# EAGLE board PCB-JOY-4AXIS (EAGLE 7.7.0)
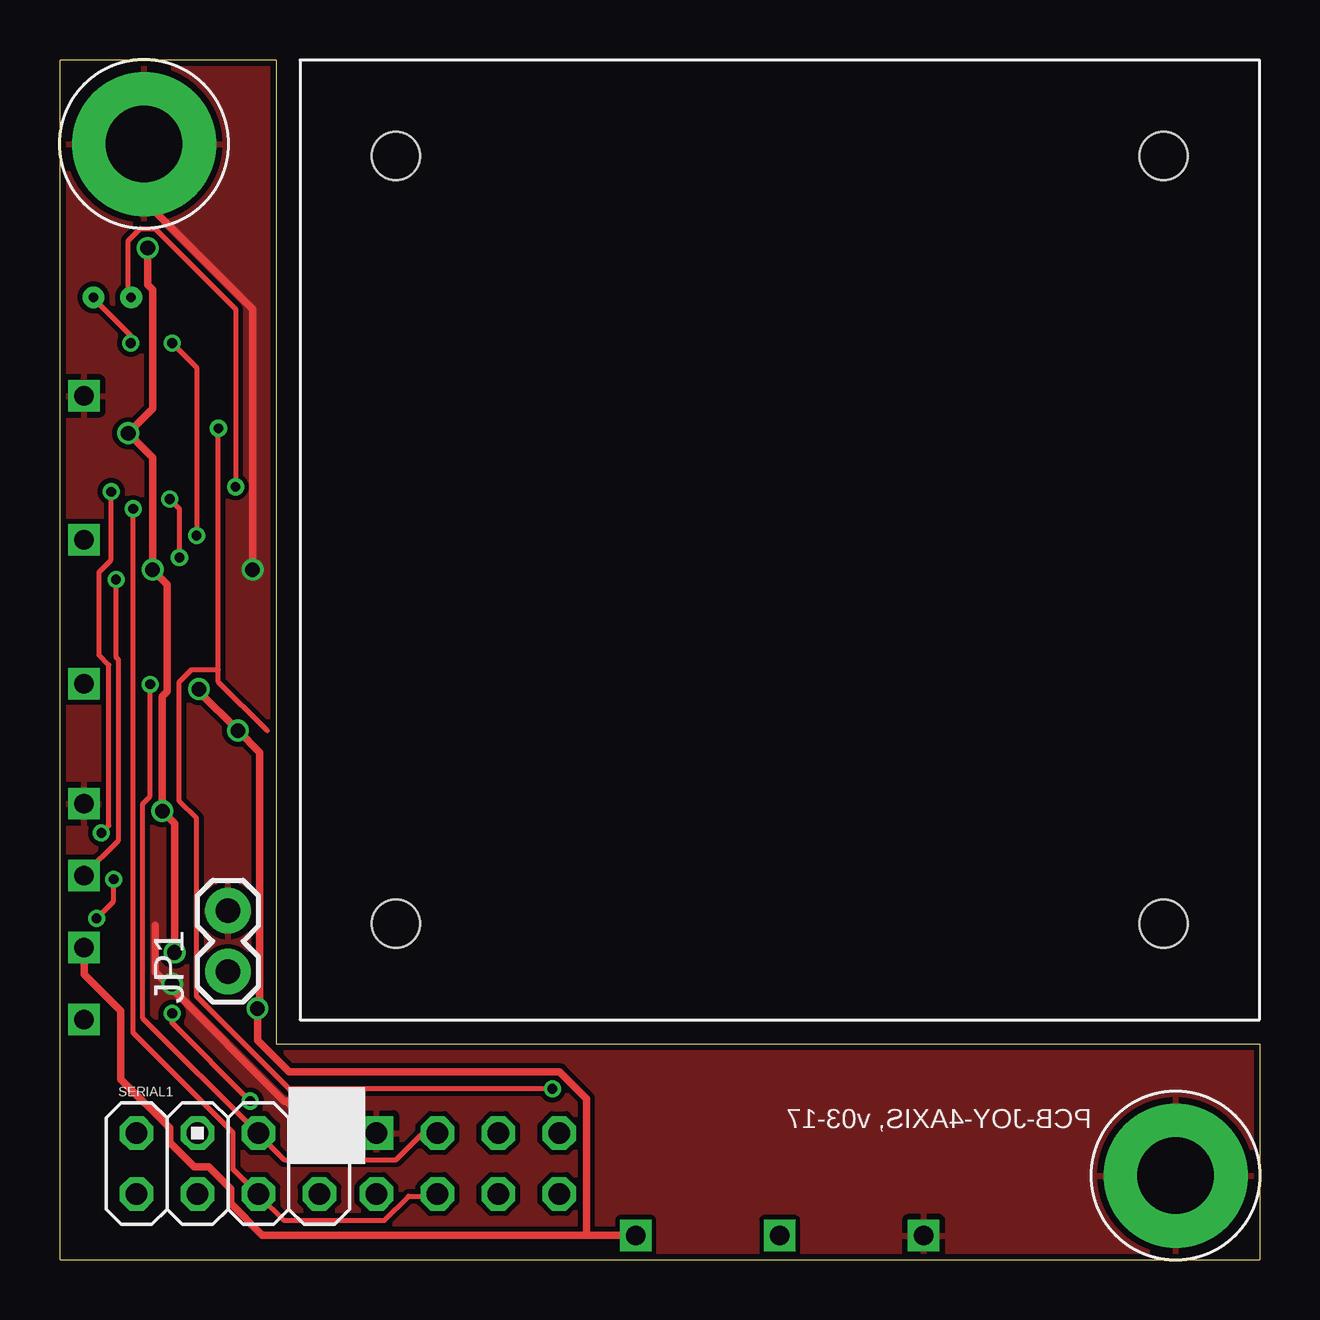
[diagram p0: board, top side]
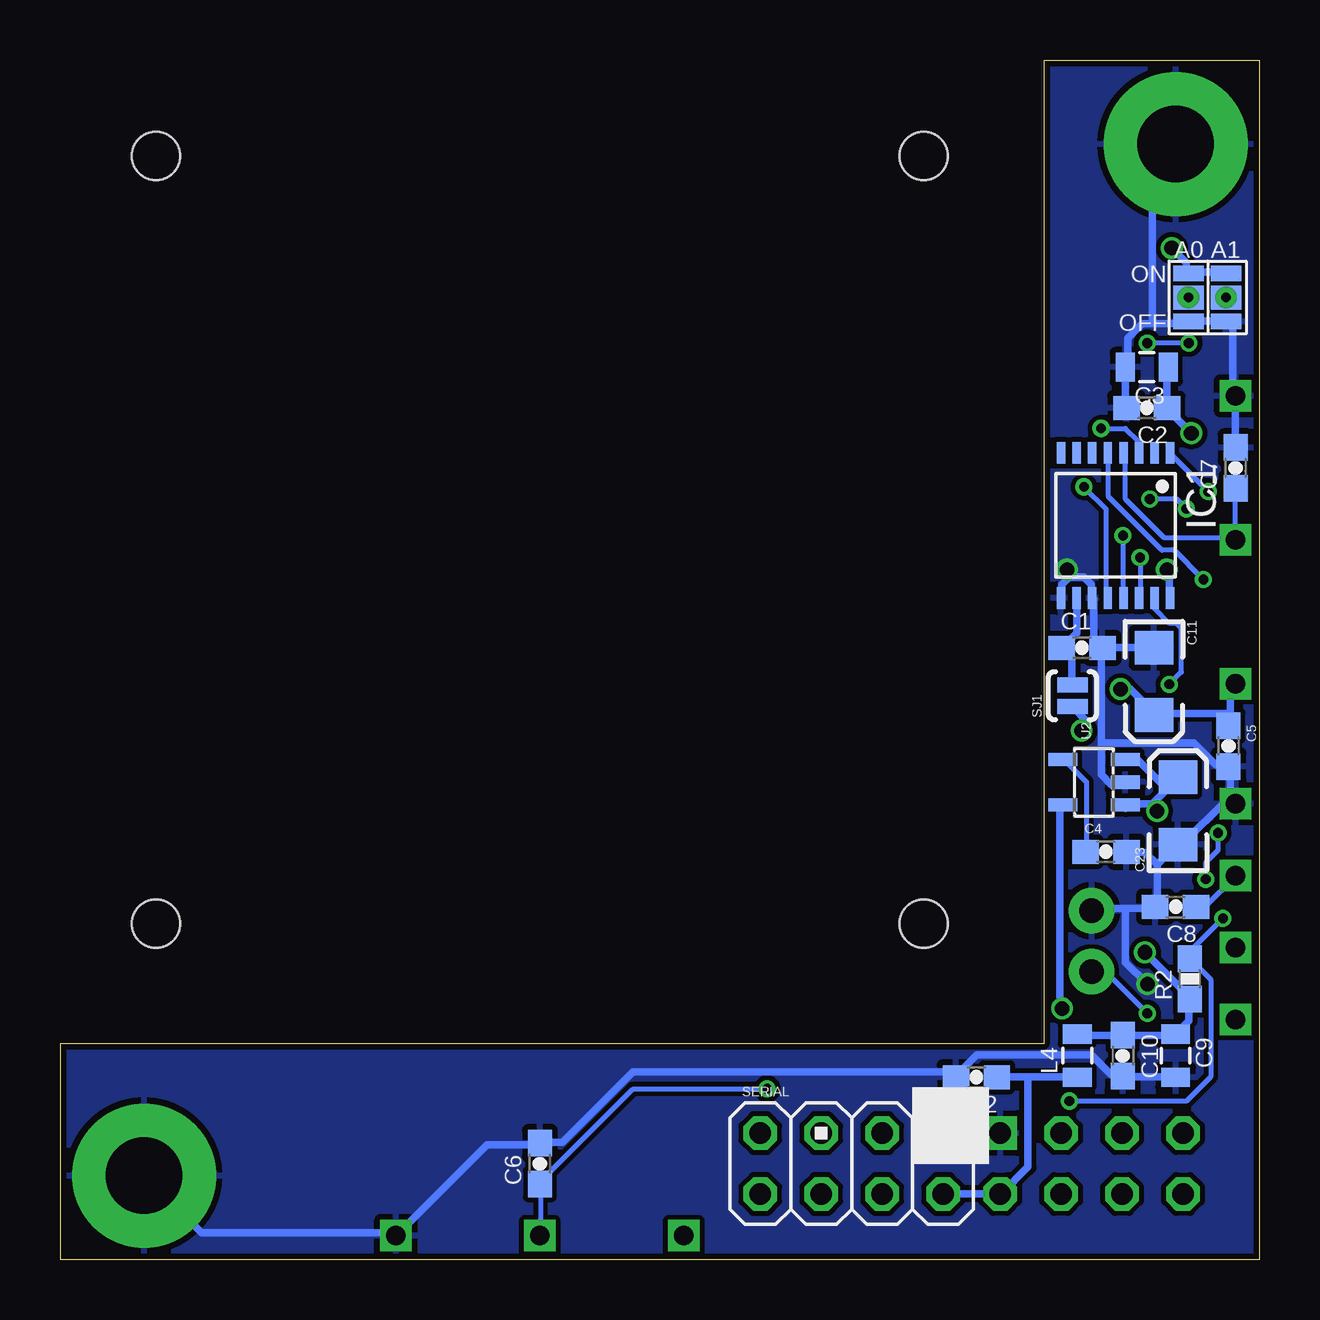
[diagram p1: board, bottom side, seen from below]

Size 50 x 50 mm. Coordinates in mm from the lower left corner, seen from the top.
Outline: 0,0 50,0 50,9 9,9 9,50 0,50 0,0
Copper layers (1*16): Top 0.035mm / dielectric 1.5mm / Bottom 0.035mm
Design rules "Fusion_eagle_rule_v1.1": minimum track width 6mil, minimum drill 12mil, track to track 6mil, track to pad 6mil, pad to pad 6mil, via to via 6mil, smd to smd 0mil, copper to edge 10mil, drill to drill 10mil, minimum pad ring 10mil, minimum via ring 6mil, stop-mask expansion 2mil, vias tented up to drill 100mil, thermal gap 10mil
Net classes: 0 default: width 0.203 mm, drill 0.406 mm, clearance 0.203 mm; 1 Power: width 0.305 mm, drill 0.61 mm, clearance 0.203 mm

## Footprints (pad centres in the part's own frame; a part is rotated, then mirrored left to right if it is on the bottom)
0603-CAP = smd 1.1 x 1: 1 -0.85,0; 2 0.85,0
0805 = smd 0.8 x 1.2: 1 -0.9,0; 2 0.9,0
EIA3216 = smd 1.4 x 1.6: A 1.4,0; C -1.4,0
TSSOP16-PW = smd 0.35 x 0.9: 1 -2.275,-3.025; 2 -1.625,-3.025; 3 -0.975,-3.025; 4 -0.325,-3.025; 5 0.325,-3.025; 6 0.975,-3.025; 7 1.625,-3.025; 8 2.275,-3.025; 9 2.275,3.025; 10 1.625,3.025; 11 0.975,3.025; 12 0.325,3.025; 13 -0.325,3.025; 14 -0.975,3.025; 15 -1.625,3.025; 16 -2.275,3.025
1X02 = drill 1.016 pad 1.88: 1 0,0; 2 2.54,0
0603-RES = smd 1.1 x 1: 1 -0.85,0; 2 0.85,0
M2X4SMALLER = drill 0.9 square: 1 -1.27,3.81 | drill 0.9 octagon: 2 1.27,3.81; 3 -1.27,1.27; 4 1.27,1.27; 5 -1.27,-1.27; 6 1.27,-1.27; 7 -1.27,-3.81; 8 1.27,-3.81
SJ_2S-NO = smd 0.635 x 1.27: 1 -0.45,0; 2 0.45,0
SOT23-5 = smd 0.55 x 1.2: 1 -0.95,-1.3; 2 0,-1.3; 3 0.95,-1.3; 4 0.95,1.3; 5 -0.95,1.3
3.2MMPAD6MM = drill 3.2 pad 6: P$1 0,0
JOYSTICK = drill 0.8 square: LR_C 0,29; LR_COM -6,29; LR_V 6,29; PUSH 29,20; ROT_C 29,14; ROT_COM 29,11; ROT_V 29,17; UD_C 29,0; UD_COM 29,-6; UD_V 29,6 | hole 2: -16,16; 16,16; 16,-16; -16,-16
2BITADDR_SMALL = drill 0.4: A0 -1.565,0; A1 0,0 | smd 1.27 x 1: AS0 -1.565,0; AS1 0,0 | smd 1.27 x 0.635: H0 -1.565,1; H1 0,1; L0 -1.565,-1; L1 0,-1

## Placement (x,y rotation side)
C1  100nF  [0603-CAP]  7.4,25.5 0 bottom
C2  100nF  [0603-CAP]  4.7,35.5 180 bottom
C3  10uF  [0805]  4.7,37.2 180 bottom
C4  1nF  [0603-CAP]  6.4,17 0 bottom
C5  100nF  [0603-CAP]  1.3,21.4 270 bottom
C6  10n  [0603-CAP]  30,4 90 bottom
C7  10n  [0603-CAP]  1,33 90 bottom
C8  10n  [0603-CAP]  3.5,14.7 180 bottom
C9  22uF  [0805]  3.5,8.5 270 bottom
C10  100nF  [0603-CAP]  5.7,8.5 270 bottom
C11  10uF 6.3V A TANT  [EIA3216]  4.4,24.1 270 bottom
C12  100nF  [0603-CAP]  11.8,7.6 180 bottom
C23  10uF 6.3V A TANT  [EIA3216]  3.4,18.7 90 bottom
IC1  ADS7828  [TSSOP16-PW]  6,30.6 180 bottom
JP1  M02PTH  [1X02]  7,12 90 top
L4  ILHB0805ER121V  [0805]  7.6,8.5 90 bottom
R2  10k  [0603-RES]  2.9,11.7 90 bottom
SERIAL  M04X2M2X4SMALLER  [M2X4SMALLER]  17,4 270 bottom
SERIAL1  M04X2M2X4SMALLER  [M2X4SMALLER]  7,4 270 top
SJ1  SOLDERJUMPERNO  [SJ_2S-NO]  7.8,23.5 90 bottom
U2  MIC5205-3.3YM5  [SOT23-5]  6.9,19.9 90 bottom
U$1  GNDPAD6MM  [3.2MMPAD6MM]  3.5,46.5 0 top
U$5  JOYSTICK_3WAYS  [JOYSTICK]  30,30 180 top
U$6  GNDPAD6MM  [3.2MMPAD6MM]  46.5,3.5 0 top
U$19  2BITADDRSMALL  [2BITADDR_SMALL]  1.4,40.1 0 bottom

## Library data of the parts
C1 C2 C10 = SparkFun; SKAARHOJ_ID: SK_100nF
C3 = SparkFun; SKAARHOJ_ID: SK_10uF
C4 C5 SJ1 = SparkFun
C6-C8 = SparkFun; SKAARHOJ_ID: SK_10nF
C9 = SparkFun; SKAARHOJ_ID: SK_22uF
C11 C23 = freetronics
C12 = SparkFun; SKAARHOJ_ID: SK_100nF; TEST: test; TEST2: testt2
IC1 = burr-brown; MF: TEXAS INSTRUMENTS; MPN: ADS7828E/250; OC_FARNELL: 1470338; OC_NEWARK: 74C7158; SKAARHOJ_ID: SK_ADS7828
JP1 = SparkFun-Connectors
L4 = SparkFun; SKAARHOJ_ID: SK_10uHBEAD
R2 = SparkFun; SKAARHOJ_ID: SK_10K
SERIAL SERIAL1 = SKAARHOJ; SKAARHOJ_ID: SK_2x4header
U2 = microbuilder
U$1 U$5 U$6 U$19 = SKAARHOJ

## Nets
5V [Power]: C2.1 C3.1 C9.1 C10.1 C23.A IC1.16 L4.2 R2.1 U2.1 U2.3 U$19.H0 U$19.H1
5V_AD [Power]: C1.1 IC1.10 SJ1.2
A0: IC1.12 U$19.A0 U$19.AS0
A1: IC1.13 U$19.A1 U$19.AS1
ARD_5V [Power]: C12.1 L4.1 SERIAL1.2 SERIAL.2
FRONT: IC1.1 JP1.1 R2.2
GND [Power]: C1.2 C2.2 C3.2 C4.2 C5.2 C6.2 C7.2 C8.2 C9.2 C10.2 C11.C C12.2 C23.C IC1.9 IC1.11 JP1.2 SERIAL1.1 SERIAL.1 U2.2 U$1.P$1 U$5.LR_COM U$5.ROT_COM U$5.UD_COM U$6.P$1 U$19.L0 U$19.L1
I2C_SCL: IC1.14 SERIAL1.4 SERIAL.4
I2C_SDA: IC1.15 SERIAL1.3 SERIAL.3
JOY_1: C6.1 IC1.3 U$5.LR_C
JOY_2: C7.1 IC1.4 U$5.UD_C
JOY_3: C8.1 IC1.5 U$5.ROT_C
N$1: C4.1 U2.4
REF [Power]: C5.1 C11.A SJ1.1 U2.5 U$5.LR_V U$5.ROT_V U$5.UD_V

## Tracks (layer width: path | path; a pad name or v marks a point on that pad's centre or on a via)
5V  (via drill 0.61)
  Top 0.305: v3.66,42.16 3.66,40.64 3.86,40.44 3.86,35.46 v2.85,34.44 3.86,33.43 v3.86,28.75 4.47,28.14 4.47,23.67 4.27,23.47 v4.27,18.69 4.78,18.19 v4.78,12.8
  Bottom 0.305: 4.47,19 5.59,19 U2.1 5.59,18.8 | 4.47,19 3.45,20.02 C23.A 3.96,19.71 5.08,20.83 5.59,20.83 U2.3 | L4.2 7.52,9.35 5.79,9.35 C10.1 5.59,9.35 3.56,9.35 C9.1 3.45,9.45 2.95,9.96 2.95,10.77 R2.1 | 3.05,10.87 R2.1 | U$19.H1 1.42,41.15 2.95,41.15 U$19.H0 3.05,41.25 3.05,41.55 v3.66,42.16 | v3.86,28.75 3.76,28.65 3.76,27.64 IC1.16 | v2.85,34.44 3.86,35.46 C2.1 3.86,35.56 3.86,37.19 C3.1 | v4.27,18.69 4.37,18.8 4.37,18.9 4.47,19 | v4.78,12.8 3.15,11.18 3.15,10.97 R2.1
5V_AD
  Bottom 0.305: IC1.10 7.62,27.53 7.62,26.11 8.23,25.5 C1.1 8.13,25.4 7.82,25.09 7.82,23.98 SJ1.2
A0  (via drill 0.41)
  Top 0.203: v7.32,32.21 7.32,39.62 3.96,42.98 3.35,42.98 2.85,42.47 2.85,40.23 2.95,40.13 U$19.AS0
  Bottom 0.203: v7.32,32.21 6.4,31.29 6.4,27.64 IC1.12 | 2.95,40.13 U$19.AS0
A1  (via drill 0.41)
  Top 0.203: v5.69,30.18 5.69,37.19 v4.67,38.2 | v2.95,38.2 2.95,38.51 1.42,40.03 U$19.AS1
  Bottom 0.203: v5.69,30.18 5.69,27.64 IC1.13 | v2.95,38.2 v4.67,38.2 | 1.42,40.13 U$19.AS1
ARD_5V
  Bottom 0.305: 9.65,7.62 7.62,7.62 L4.1 | 9.65,7.62 10.87,7.62 C12.1 | 9.65,7.62 9.65,3.86 10.77,2.74 SERIAL1.2 10.97,2.74 13.11,2.74 SERIAL.2
FRONT  (via drill 0.41)
  Top 0.203: v2.13,32 2.13,29.16 1.63,28.65 1.63,25.2 2.03,24.79 2.03,18.09 v1.73,17.78 | v2.23,15.85 2.23,14.94 v1.52,14.22 | v4.67,10.26 4.67,9.86 v7.92,6.6
  Bottom 0.203: v2.13,32 3.66,33.53 IC1.1 | v1.73,17.78 1.73,17.07 2.23,16.56 v2.23,15.85 | v1.52,14.22 2.85,12.9 2.85,12.6 R2.2 2.85,12.5 2.03,11.68 2.03,7.62 3.05,6.6 v7.92,6.6 | v4.67,10.26 6.4,11.99 6.91,11.99 JP1.1
GND  (via drill 0.61)
  Top 0.305: 4.57,11.38 3.96,11.99 3.96,13.92 | 4.57,11.38 9.35,6.6 9.45,6.6 10.77,5.28 SERIAL1.1 | v8.03,28.75 8.03,39.62 3.56,44.09 3.56,46.43 U$1.P$1 | v4.67,11.48 4.57,11.38
  Bottom 0.305: U$6.P$1 46.43,3.45 44.09,1.12 36.07,1.12 U$5.LR_COM 35.97,1.02 32.21,4.78 30.07,4.78 C6.2 29.87,4.88 29.06,4.88 26.11,7.82 12.7,7.82 C12.2 | C7.2 1.02,33.93 1.02,35.97 U$5.UD_COM 1.12,36.07 1.12,38.81 1.32,39.01 U$19.L1 1.42,39.12 2.95,39.12 U$19.L0 3.05,39.01 4.47,39.01 | C2.2 5.59,35.56 5.59,37.19 C3.2 5.49,37.29 5.49,38.41 4.88,39.01 4.47,39.01 | 4.47,39.01 4.47,45.52 3.56,46.43 U$1.P$1 | C9.2 3.56,7.62 5.69,7.62 C10.2 5.79,7.72 6.2,7.72 7.01,8.53 11.79,8.53 12.6,7.72 C12.2 | C12.2 12.7,7.52 12.7,5.69 13.11,5.28 SERIAL.1 12.6,5.59 12.29,5.28 10.87,5.28 SERIAL1.1 | 4.27,16.46 4.27,14.73 C8.2 4.47,14.63 5.59,14.63 | 4.27,16.46 3.45,17.27 C23.C 3.25,17.27 1.32,19.2 U$5.ROT_COM 1.02,19.1 1.22,19.3 1.22,20.52 C5.2 1.42,20.62 1.83,20.62 2.74,21.54 6.6,21.54 | C1.2 6.6,25.5 6.91,25.81 6.91,27.53 IC1.11 7.01,27.64 7.01,28.14 7.32,28.45 7.92,28.45 | 7.92,28.45 8.23,28.14 8.23,27.64 IC1.9 | C11.C 4.47,25.5 6.4,25.5 C1.2 | U2.2 5.69,19.81 6.2,19.81 6.6,20.22 6.6,21.54 | 6.6,21.54 6.6,25.4 C1.2 | v8.03,28.75 8.03,28.55 7.92,28.45 | 4.27,16.46 4.78,16.97 5.49,16.97 C4.2 | 5.59,14.63 6.91,14.63 JP1.2 | 5.59,14.63 5.59,12.39 v4.67,11.48
  pour Top: 0,0 50,0 50,9 9,9 9,50 0,50
  pour Bottom: 0,50 0,0 50,0 50,9 9,9 9,50
I2C_SCL  (via drill 0.41)
  Top 0.203: v4.98,29.26 4.98,31.29 v4.57,31.7 | v3.05,31.29 3.05,9.45 7.21,5.28 7.21,3.76 8.23,2.74 SERIAL1.4 8.33,2.64 9.35,1.63 13.51,1.63 14.53,2.64 15.65,2.64 SERIAL.4
  Bottom 0.203: v4.98,29.26 4.98,27.64 IC1.14 | v4.57,31.7 3.45,31.7 v3.05,31.29
I2C_SDA  (via drill 0.41)
  Top 0.203: v3.76,23.98 3.76,19.3 3.45,19 3.45,10.06 8.23,5.28 SERIAL1.3 8.33,5.18 9.35,4.17 14.02,4.17 15.04,5.18 15.65,5.18 SERIAL.3
  Bottom 0.203: v3.76,23.98 3.25,24.49 3.25,26.31 3.45,26.52 3.76,26.52 4.37,27.13 4.37,27.53 IC1.15
JOY_1  (via drill 0.41)
  Top 0.203: 6.6,24.59 6.6,24.08 8.64,22.05 | 6.6,24.59 v6.6,34.65 | v20.52,7.11 9.55,7.11 5.69,10.97 5.69,18.39 4.98,19.1 4.98,24.08 5.49,24.59 6.6,24.59
  Bottom 0.203: v6.6,34.65 5.59,34.65 5.08,34.14 5.08,33.63 IC1.3 | v20.52,7.11 26.11,7.11 29.97,3.25 C6.1 29.97,3.15 29.97,1.02 U$5.LR_C
JOY_2
  Bottom 0.203: IC1.4 5.59,33.53 5.59,31.7 3.96,30.07 1.02,30.07 U$5.UD_C 1.02,30.18 1.02,32.11 C7.1
JOY_3  (via drill 0.41)
  Top 0.203: v2.34,28.35 2.34,25.09 2.44,24.99 2.44,17.48 1.02,16.05 U$5.ROT_C
  Bottom 0.203: v2.34,28.35 3.56,29.57 4.06,29.57 6.3,31.8 6.3,33.53 IC1.5 | C8.1 2.64,14.73 2.23,14.73 1.02,15.95 U$5.ROT_C
N$1
  Bottom 0.203: C4.1 7.21,17.07 7.21,19.91 8.13,20.83 U2.4
REF  (via drill 0.61)
  Top 0.305: v5.79,23.77 5.79,23.67 v7.42,22.05 8.33,21.13 8.33,10.57 v8.23,10.46 8.23,9.14 9.55,7.82 20.83,7.82 21.95,6.71 21.95,1.02 | 21.95,1.02 23.98,1.02 U$5.LR_V | 21.95,1.02 8.43,1.02 7.11,2.34 7.11,2.95 6.2,3.86 5.59,3.86 4.57,4.88 4.57,5.49 2.54,7.52 2.54,10.36 1.02,11.89 1.02,12.9 U$5.ROT_V
  Bottom 0.305: 8.13,19 U2.5 | SJ1.1 7.72,22.96 7.21,22.45 7.21,22.05 v7.42,22.05 | U$5.UD_V 1.02,23.98 1.22,23.77 1.22,22.25 C5.1 1.32,22.76 4.37,22.76 C11.A 4.47,22.86 5.38,23.77 v5.79,23.77 | 8.33,10.57 v8.23,10.46 8.33,10.67 8.33,18.8 U2.5 | 8.33,18.9 U2.5

## Text on the board
_tsilk: PCB-JOY-4AXIS, v03-17